# Altium PCB PCB1.PcbDoc
Units mil, origin at the board's own origin, x right, y up, seen from the top; angles counter-clockwise.
Board outline 2900 x 1835 mil, 2 copper layers (Top Layer, Bottom Layer); 33 components, 27 nets, 151 pads, 20 vias.
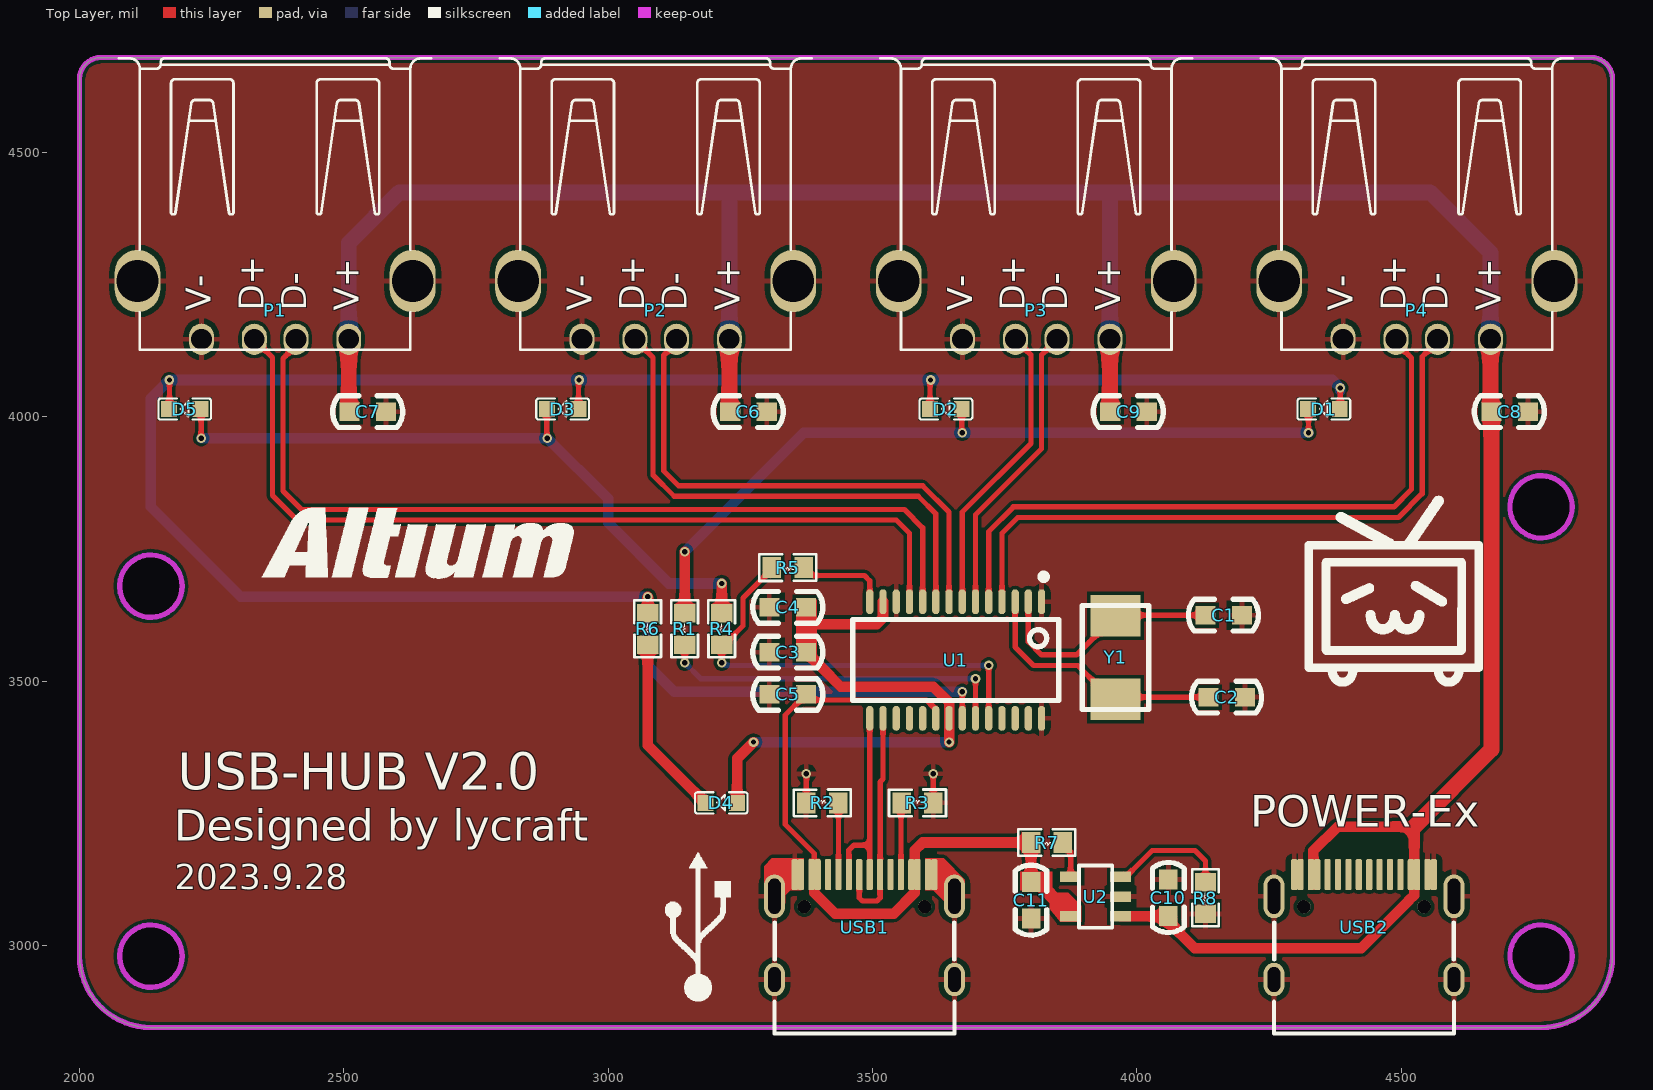
[diagram p0: Top Layer view]
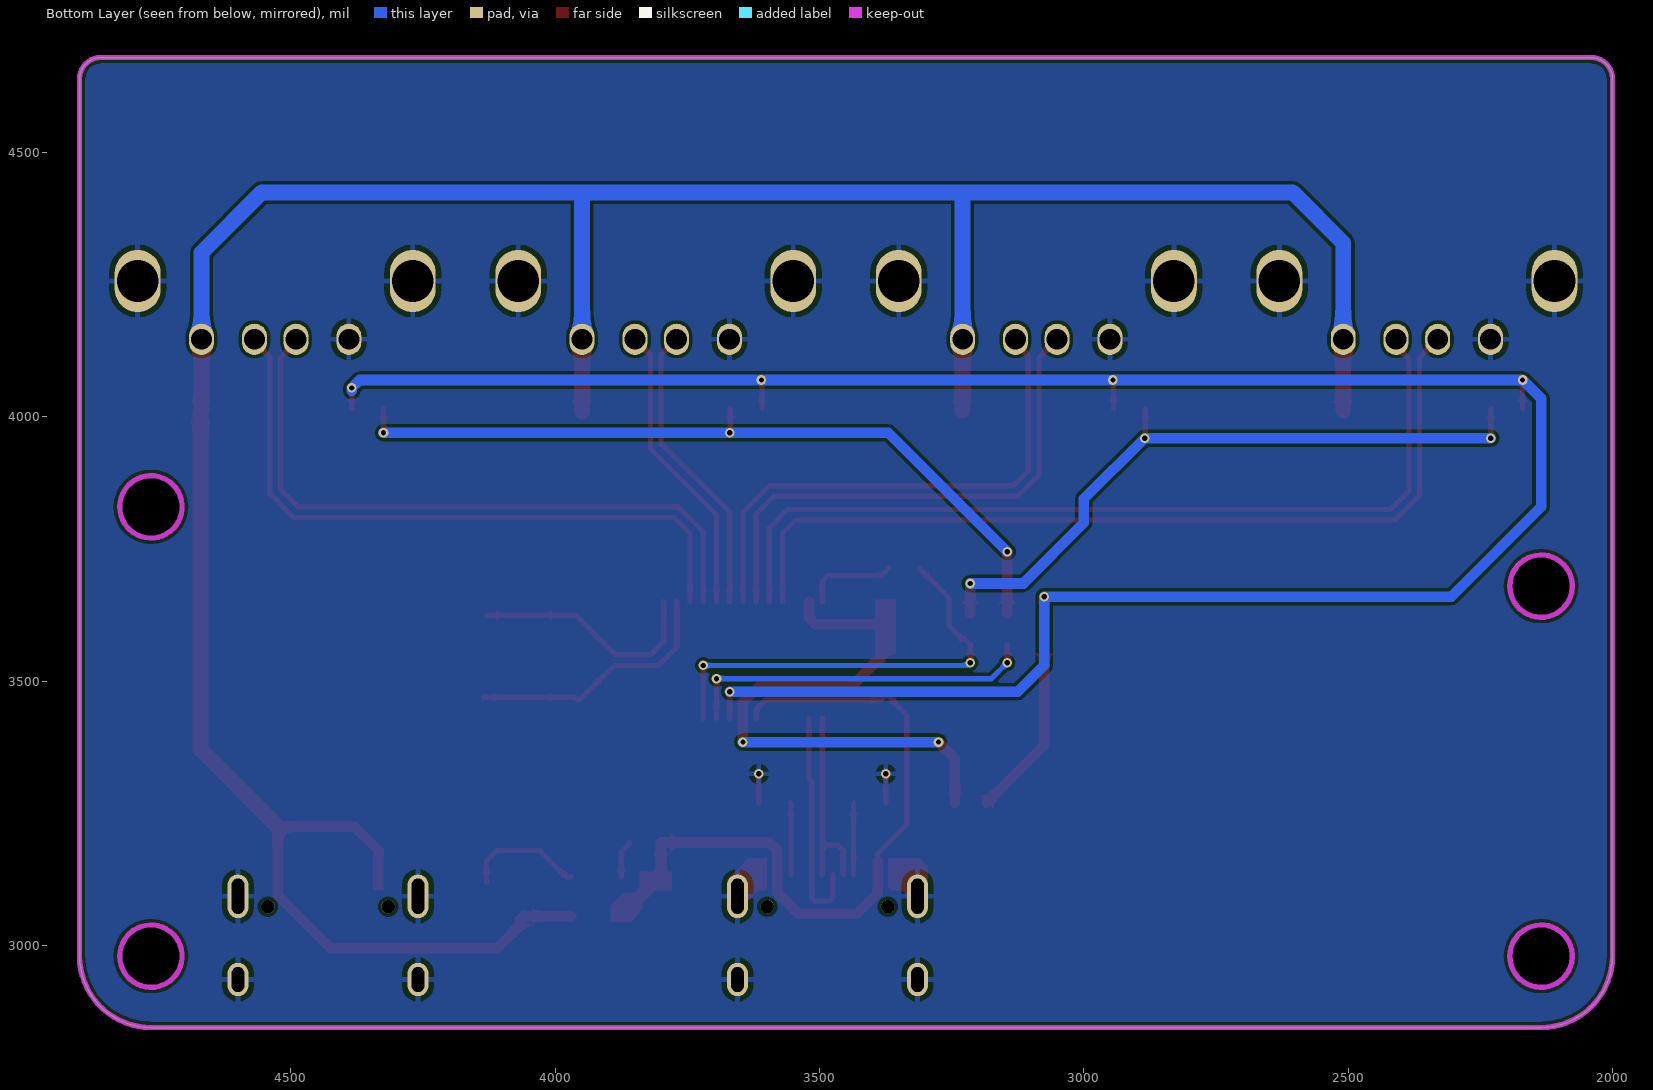
[diagram p1: Bottom Layer view, seen from below]
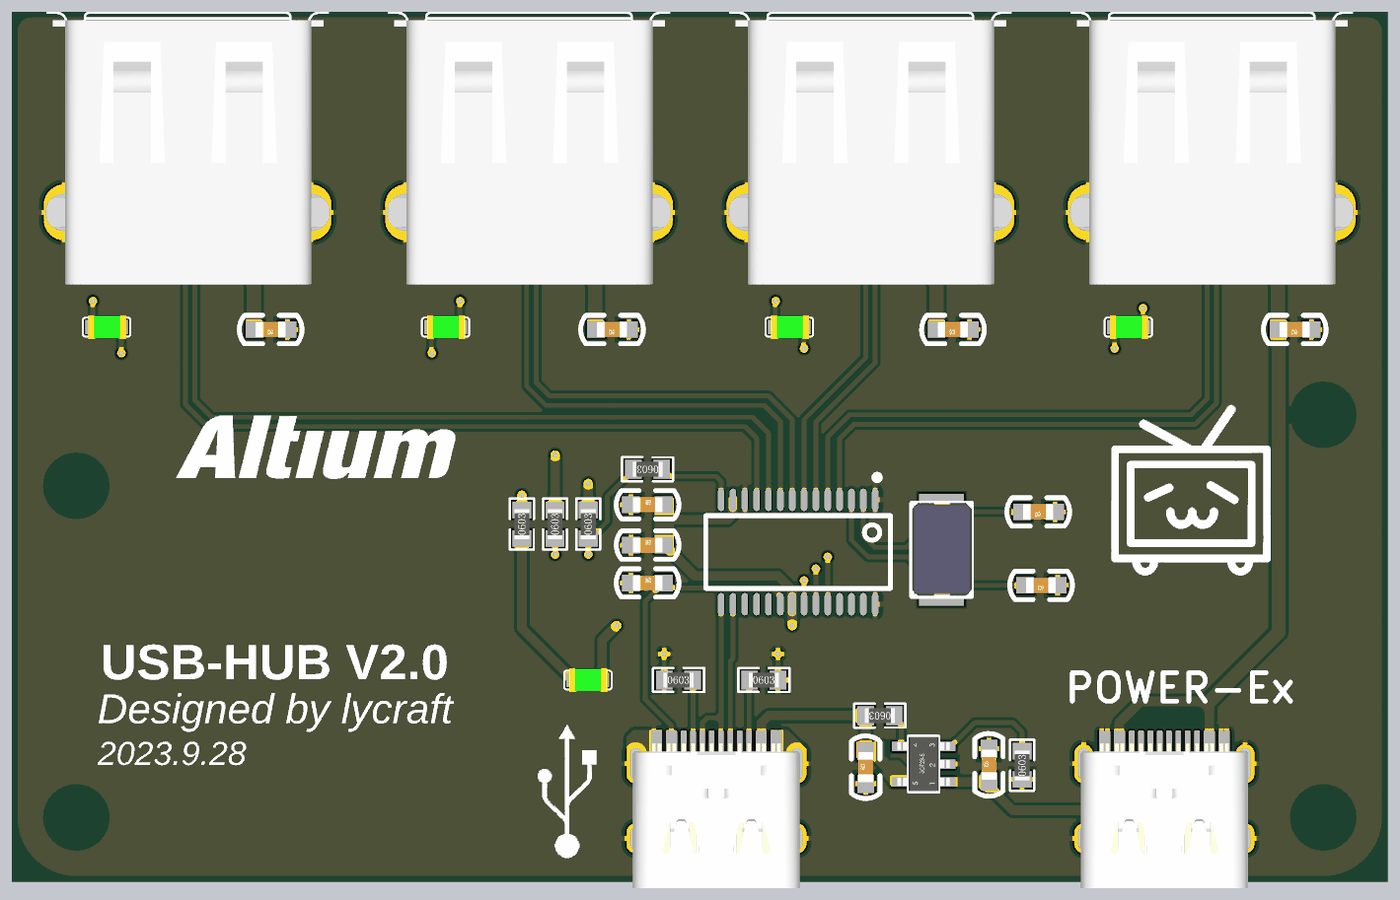
[diagram p2: 3D render of the assembled board from above, using the file's embedded part models]

## Layer stack, top to bottom
Top Solder: solder mask 0.4, Solder Resist, Dk 3.5
Top Layer: signal copper 1.4
Dielectric 1: dielectric 12.6, FR-4, Dk 4.8
Bottom Layer: signal copper 1.4
Bottom Solder: solder mask 0.4, Solder Resist, Dk 3.5

## Board outline
2135,2845 cw(c2135,2980) 2000,2980 2000,4640 cw(c2040,4640) 2040,4680 4860,4680 cw(c4860,4640) 4900,4640 4900,2980 cw(c4765,2980) 4765,2845
cut-out: 2135,3040 cw(c2135,2980.94) 2194.06,2980.94 cw(c2134.97,2980.94) 2134.97,2921.86 cw(c2134.05,2980.92) 2075,2980 cw(c2135,2980)
cut-out: 2135,3740 cw(c2135,3680.94) 2194.06,3680.94 cw(c2134.97,3680.94) 2134.97,3621.86 cw(c2134.05,3680.92) 2075,3680 cw(c2135,3680)
cut-out: 4765,3040 cw(c4765,2980.94) 4824.06,2980.94 cw(c4764.97,2980.94) 4764.97,2921.86 cw(c4764.05,2980.92) 4705,2980 cw(c4765,2980)
cut-out: 4765,3890 cw(c4765,3830.94) 4824.06,3830.94 cw(c4764.97,3830.94) 4764.97,3771.86 cw(c4764.05,3830.92) 4705,3830 cw(c4765,3830)

## Design rules (kind name [scope] priority, off if disabled: settings)
Clearance [All] p1: gap=6 ignorepadtopadclearanceinfootprint=TRUE
PolygonConnect [All] p1: connectstyle=Relief reliefconductorwidth=10 reliefentries=4 polygonreliefangle="90 Angle" airgapwidth=10
RoutingVias [All] p1: holewidth=10 width=18 viastyle="Through Hole" minholewidth=10 minwidth=18 maxholewidth=12 maxwidth=50
SolderMaskExpansion [All] p1: expansion=4 istentingtop=FALSE
Width [All] p1: maxlimit=50 minlimit=6 preferedwidth=10 minimp=50.000000 maximp=50.000000 favimp=50.000000
30 further rules are at their usual default settings.

## Components (designator, comment, footprint, x,y, rotation, side; value= is the part's Value field where it differs from the comment)
C1 "22pF" C0603 4199,3625 r180 top value=104
C2 "22pF" C0603 4205,3470 r180 top value=104
C3 "1uF" C0603 3305,3555 r0 top value=104
C4 "1uF" C0603 3305,3640 r0 top value=104
C5 "1uF" C0603 3305,3475 r0 top value=104
C6 "0.1uF" C0603 3300,4010 r180 top value=104
C7 "0.1uF" C0603 2580,4010 r180 top value=104
C8 "0.1uF" C0603 4740,4010 r180 top value=104
C9 "0.1uF" C0603 4019,4010 r180 top value=104
C10 "10uF" C0603 4060,3056 r90 top value=104
C11 "10uF" C0603 3800,3051 r90 top value=104
D1 "color?" LED0603 4355,4015 r180 top
D2 "color?" LED0603 3640,4015 r180 top
D3 "color?" LED0603 2915,4015 r180 top
D4 "color?" LED0603 3215,3270 r180 top
D5 "color?" LED0603 2200,4015 r180 top
P1 "USB" USBB 2310,4385 r270 top
P2 "USB" USBB 3030,4385 r270 top
P3 "USB" USBB 3750,4385 r270 top
P4 "USB" USBB 4470,4385 r270 top
R1 "220" R0603 3144.87,3599.04 r90 top value=1K
R2 "5.1k" R0603 3405,3270 r0 top value=1K
R3 "5.1k" R0603 3585,3270 r0 top value=1K
R4 "220" R0603 3214.87,3599.04 r90 top value=1K
R5 "1K" R0603 3340,3715 r180 top
R6 "470" R0603 3074.87,3599.04 r90 top value=1K
R7 "1K" R0603 3830,3195 r180 top
R8 "8.45K" R0603 4130,3090 r90 top value=1K
U1 "CH334U" QSOP28 3820,3650.47 r180 top
U2 "MT9700" SOT23-5 3969.49,3055.2 r90 top
USB1 "Type-C" Type-C-TOP 3485,3035 r270 top
USB2 "Type-C" Type-C-TOP 4430,3035 r270 top
Y1 "12M" "5032 2Pin" 3960,3545 r270 top

## Footprints (in the part's own frame and the unit in brackets; to place one, negate y for a bottom-side part, rotate by r counter-clockwise, add the part's x,y. Pads: shape width x height; smd on the part's side, far side on the other; paste and mask are expansions set on the pad)
"5032 2Pin" [mm]
  rect 2x2.4 smd: 1(-2,0) 2(2,0)
  silkscreen extent -2.5,-1.6 2.5,1.6, body extent -2.53,-1.57 2.47,1.63, height 1.3
C0603 [mil]
  rect 38x35 smd: 1(0,0) 2(69,0)
  silkscreen extent -31,-30 101,30, body extent 4,-16 67,16, height 12
LED0603 [mil]
  rect 30x30 smd: 1(-29,0) 2(31,0)
  silkscreen extent -49,-20 51,20, body extent -40,-25 40,25, height 43
QSOP28 [mm]
  oval 0.35x1.2 smd mask+0.051: 1(0,0) 2(0.635,0) 3(1.27,0) 4(1.905,0) 5(2.54,0) 6(3.175,0) 7(3.81,0) 8(4.445,0) 9(5.08,0) 10(5.715,0) 11(6.35,0) 12(6.985,0) 13(7.62,0) 14(8.255,0) 15(8.255,5.6) 16(7.62,5.6) 17(6.985,5.6) 18(6.35,5.6) 19(5.715,5.6) 20(5.08,5.6) 21(4.445,5.6) 22(3.81,5.6) 23(3.175,5.6) 24(2.54,5.6) 25(1.905,5.6) 26(1.27,5.6) 27(0.635,5.6) 28(0,5.6)
  silkscreen extent -0.82,-1.35 9.08,4.75
R0603 [mil]
  rect 35x40 smd: 1(-30,0) 2(30,0)
  silkscreen extent -54,-25 54,25, body extent -32,-16 31,16, height 18
SOT23-5 [mm]
  rect 0.5x1 smd: 1(0,0) 2(0.95,0) 3(1.9,0) 4(1.9,2.4) 5(0,2.4)
  silkscreen extent -0.55,0.4 2.45,2, body extent -0.5,-0.2 2.4,2.6, height 1.09
Type-C-TOP [mm]
  round 0.65 hole 0.65: 0(-0.98,2.89) 0(-0.98,-2.89)
  oval 1.6x1 hole 0.6 slot 1.2 at 0 deg: 1(2.52,4.325) 2(2.52,-4.325)
  oval 2.1x1 hole 0.6 slot 1.7 at 0 deg: 3(-1.48,-4.325) 4(-1.48,4.325)
  rrect50% 1.5x0.3 smd: A1(-2.52,-3.35) A4(-2.52,-2.55) A5(-2.52,-1.25) A6(-2.52,-0.25) A7(-2.52,0.25) A8(-2.52,1.25) A9(-2.52,2.55) A12(-2.52,3.35) B1(-2.52,3.05) B4(-2.52,2.25) B5(-2.52,1.75) B6(-2.52,0.75) B7(-2.52,-0.75) B8(-2.52,-1.75) B9(-2.52,-2.25) B12(-2.52,-3.05)
  silkscreen extent -0.22,-4.33 5.12,4.33, body extent -2.57,-4.48 5.18,4.48, height 3.26
USBB [mm]
  oval 1.5x1.2 hole 1: 1(6.044,5.062) 2(6.044,2.522) 3(6.044,0.522) 4(6.044,-2.018)
  oval 3x2.2 hole 2: 5(3.244,8.132) 6(3.244,-5.088)
  silkscreen extent -7.46,-5.98 6.54,9.02, body extent -7.05,-6.35 7.11,9.45, height 2.4

## Part data
C1 C2 C3 C4 C5 C6 C7 C8 C9 C10 C11: library part 贴片C, "Capacitor", LatestRevisionDate=17-Jul-2002, LatestRevisionNote="Re-released for DXP Platform.", PackageReference=RAD-0.3, Published=8-Jun-2000, Publisher="Altium Limited"
D1 D2 D3 D4 D5: library part 贴片LED, "LED", Type=0402
P1 P2 P3 P4: "USB 1.1, Right Angle, SMT, A Type, Plug, 4 Position, Natural", PackageDocument=21-Jan-2003, ComponentLink1Description="Manufacturer Link", ComponentLink1URL=http://www.tycoelectronics.com/, ComponentLink2Description="Packaging Specification", ComponentLink2URL=http://ecommas.tycoelectronics.com/commerce/DocumentDelivery/DDEController?Action=showdoc&DocId=Customer+Drawing%7F1470695%7FO%7Fpdf%7FEnglish%7FC_1470695_O.pdf, ContactMaterial=Brass, ContactPlating="Gold (30) over Nickel (50)", DatasheetDocument=21-Jan-2003, DrillSize="Corresponds to nominal value.", HousingMaterial=Thermoplastic, PackageReference=1470695A, PanelGround=Without, PCB_Layout="Complies with manufacturer's recommendation.", Published=15-Jul-2004, Publisher="Altium Limited"
R1 R2 R3 R4 R5 R6 R7 R8: library part 贴片R, "Resistor", Published=8-Jun-2000, Publisher="Altium Limited", Revision="July-2002: Re-released for DXP Platform."
U1: "4 ports High-Speed USB MTT Hub with over current detect & power control"
U2: "USB电流保护"
USB1 USB2: library part USB-Type-C-TOP
Y1: library part "XTAL 8Mhz 2pin"

## Via types
v1: diameter 18, hole 10, Top Layer to Bottom Layer, 20 vias

## Nets (pads, with @x,y where several pads share a name; then routed paths per layer and width w, separated by ;. In a path a pad name is that pad's centre, name@x,y a point inside that pad or via, vN(x,y) a via of type N, cw(c..) or ccw(c..) an arc to the next point about the centre after c; other vN are vias at no path point)
3.3V: C3.2 C4.2 D4.1 U1.13 U1.21 | length 1151.2
  Top Layer w20: D4.1 3244,3354 v1(3275,3385) ; C4.2 3374,3615 3374,3602.5 C3.2 3375.5,3555 3402.14,3528.36 3402.14,3527.86 3440,3490 3615,3490 3645,3460 v1(3645,3385) ; 3375,3602.5 3380.75,3608.25 3508.28,3608.25 3520,3619.97 U1.13
  Bottom Layer w20: v1(3275,3385) v1(3645,3385)
DM1: P1.2 U1.10 | length 1675.8
  Top Layer w10: P1.2 2409.28,4135.08 2385,4110.8 2385,3860 2420,3825 3560.36,3825 3595,3790.36 U1.10
DM2: P2.2 U1.8 | length 1000.8
  Top Layer w10: P2.2 3129.28,4141.15 3105,4116.87 3105,3898.28 3133.28,3870 3595,3870 3645,3820 U1.8
DM3: P3.2 U1.6 | length 560.5
  Top Layer w10: U1.6 3695,3815 3820,3940 3820,4117.78 P3.2
DM4: P4.2 U1.4 | length 1259.9
  Top Layer w10: U1.4 3745,3780.15 3774.85,3810 4413.28,3810 4495,3810 4540,3855 4540,4114.09 4569.28,4143.36 P4.2
DMU: U1.15 USB1.A7 USB1.B7 | length 385.6
  Top Layer w10: USB1.B7 3455.47,3180.47 3465,3190 3495,3190 ; USB1.A7 3494.84,3168.74 3495,3168.9 3495,3190 ; U1.15 3495,3190
DP1: P1.3 U1.11 | length 1673.8
  Top Layer w10: P1.3 2365,4112.59 2365,3851.72 2411.72,3805 2460,3805 3545,3805 3570,3780 U1.11
DP2: P2.3 U1.9 | length 1002.9
  Top Layer w10: P2.3 3085,4112.59 3085,3890 3125,3850 3586.72,3850 3620,3816.72 U1.9
DP3: P3.3 U1.7 | length 562.6
  Top Layer w10: U1.7 3670,3820 3800,3950 3800,4117.59 P3.3
DP4: P4.3 U1.5 | length 1262
  Top Layer w10: U1.5 3720,3783.43 3766.57,3830 4486.72,3830 4520,3863.28 4520,4111.68 4490.54,4141.15 P4.3
DPU: U1.16 USB1.A6 USB1.B6 | length 429.9
  Top Layer w10: USB1.A6 3475.16,3090.39 3481.02,3084.53 3508.67,3084.53 3514.53,3090.39 3514.53,3309.53 3520,3315 U1.16
GND: C1.1 C2.1 C3.1 C4.1 C5.1 C6.1 C7.1 C8.1 C9.1 C10.2 C11.1 P1.4 P1.5 P1.6 P2.4 P2.5 P2.6 P3.4 P3.5 P3.6 P4.4 P4.5 P4.6 R2.1 R3.2 R8.1 U1.1 U1.12 U1.28 U2.2 USB1.1 USB1.2 USB1.3 USB1.4 USB1.A1 USB1.A12 USB1.B1 USB1.B12 USB2.1 USB2.2 USB2.3 USB2.4 USB2.A1 USB2.A12 USB2.B1 USB2.B12 | length 168.8
  Top Layer w10: USB1.A1 USB1.B12 ; R2.1 v1(3375,3325) ; USB1.B1 3605.08,3112.18 USB1.B1@3605.98,3111.28 ; R3.2 v1(3615,3325) ; USB1.4@3641.71,3111.28 3655.28,3097.71 USB1.4
LED1: R1.1 U1.23 | length 671.5
  Top Layer w10: R1.1 3145,3568.91 v1(3145,3535) ; U1.23 v1(3695,3505)
  Bottom Layer w10: v1(3145,3535) 3175,3505 v1(3695,3505)
LED2: R4.1 R5.2 U1.24 | length 829
  Top Layer w10: v1(3215,3535) 3214.87,3535.13 R4.1 3227.37,3581.54 3231.54,3581.54 3255,3605 3255,3657.5 3310,3712.5 R5.2 ; U1.24 v1(3720,3530)
  Bottom Layer w10: v1(3215,3535) 3220,3530 v1(3720,3530)
LED3: R5.1 U1.14 | length 176.3
  Top Layer w10: R5.1 3370,3712.5 3382.5,3700 3485,3700 3495,3690 U1.14
LED4: D1.1 D2.2 D3.1 D5.2 R6.2 U1.22 | length 4524.5
  Top Layer w10: D5.2 2170,4016 v1(2170,4070) ; D3.1 2944,4069 v1(2945,4070) ; D2.2 3609,4069 v1(3610,4070) ; U1.22 v1(3670,3480) ; D1.1 4385,4016 v1(4385,4055)
  Top Layer w20: R6.2 3075,3629.17 v1(3075,3660)
  Bottom Layer w20: v1(3670,3480) 3125,3480 3075,3530 v1(3075,3660) 2305,3660 2135,3830 2135,4035 v1(2170,4070) v1(2945,4070) v1(3610,4070) 4370,4070 v1(4385,4055) v1@4385,4050
NetD1_2: D1.2 D2.1 R1.2 | length 1480
  Top Layer w10: D2.1 3669,3971 v1(3670,3970) ; D1.2 4325,4014 v1(4325,3970)
  Top Layer w20: R1.2 3144.87,3744.87 v1(3145,3745)
  Bottom Layer w20: v1(3145,3745) 3370,3970 v1(3670,3970) v1(4325,3970)
NetD3_2: D3.2 D5.1 R4.2 | length 1292.1
  Top Layer w10: D5.1 2230,4014 v1(2230,3960) ; D3.2 2884,3961 v1(2885,3960) ; v1@3214.87,3684.87 v1(3215,3685)
  Top Layer w20: R4.2 v1@3214.87,3684.87
  Bottom Layer w20: v1(2230,3960) v1(2885,3960) 3000,3845 3000,3800 3115,3685 v1(3215,3685)
NetD4_2: D4.2 R6.1 | length 344.2
  Top Layer w20: R6.1 3074.87,3379.13 D4.2
NetR2_2: R2.2 USB1.A5 | length 136.1
  Top Layer w10: R2.2 3435.79,3269.21 USB1.A5
NetR3_1: R3.1 USB1.B5 | length 136.2
  Top Layer w10: USB1.B5 3553.9,3268.9 R3.1
NetR7_1: R7.1 U2.4 | length 71.2
  Top Layer w10: R7.1 3860,3192.5 3875,3177.5 U2.4
NetR8_2: R8.2 U2.3 | length 229.5
  Top Layer w10: U2.3 3979.33,3130 4029.33,3180 4110,3180 4130,3160 R8.2
Vbus: C6.2 C7.2 C8.2 C9.2 C10.1 P1.1 P2.1 P3.1 P4.1 U2.1 USB2.A4 USB2.A9 USB2.B4 USB2.B9 | length 5470.2
  Top Layer w10: C7.2@2509.27,4011.73 C7.2 ; C6.2@3229.27,4011.73 C6.2 ; C9.2@3949.27,4010.73 C9.2
  Top Layer w20: U2.1 4059.2,3055.2 C10.1 4067.5,3048.5 4067.5,3037.5 4110,2995 4425,2995 4514.98,3084.98 4514.98,3085.51 4525,3095.53 4525,3105 ; 4335,3165 4334.32,3165.68 4334.32,3179.32 4380,3225 4525,3225 4525,3165 ; C8.2@4669.27,4011.73 C8.2
  Top Layer w30: C7.2@2509.27,4011.73 P1.1 ; C6.2@3229.27,4011.73 P2.1 ; C9.2@3949.27,4010.73 P3.1 ; 4525,3225 4671,3371 C8.2 ; C8.2@4669.27,4011.73 P4.1
  Bottom Layer w30: P1.1 2509.27,4329.27 2605,4425 3230,4425 ; P2.1 3229.27,4424.27 3230,4425 ; P3.1 3949.27,4420.73 3945,4425 ; P4.1 4669.27,4310.73 4555,4425 3945,4425 ; 3230,4425 3945,4425
VCC: C5.2 C11.2 R7.2 U1.20 U2.5 USB1.A4 USB1.A9 USB1.B4 USB1.B9 | length 1204
  Top Layer w10: 3390,3165 3390,3174.14 3335,3229.14 3335,3436 3360,3461 3360,3462.5 3372.5,3475 C5.2 3384.38,3464.62 3602.41,3464.62 3620,3447.03 U1.20 ; USB1.B4 USB1.A9@3580,3127.8 ; USB1.B4@3574.84,3109.84 3579.67,3109.84 USB1.A9@3584.49,3109.84 ; USB1.A9@3584.49,3127.8 3584.49,3133.31 USB1.A9
  Top Layer w20: 3390,3105 3390,3100 3430,3060 3540,3060 3579.67,3099.67 USB1.A9@3579.67,3109.84 ; 3580,3165 3580,3180 3595,3195 R7.2 C11.2
XTALI: C2.2 U1.3 Y1.2 | length 493.9
  Top Layer w10: U1.3 3770,3565 3805,3530 3888.39,3530 3952.13,3466.26 Y1.2 3963.74,3470 C2.2
XTALO: C1.2 U1.2 Y1.1 | length 451.9
  Top Layer w10: U1.2 3795,3575 3820,3550 3886.26,3550 Y1.1 3961.26,3625 C1.2
pads on no net: U1.17 U1.18 U1.19 U1.25 U1.26 U1.27 USB1.0 USB1.A8 USB1.B8 USB2.0 USB2.A5 USB2.A6 USB2.A7 USB2.A8 USB2.B5 USB2.B6 USB2.B7 USB2.B8

## Polygon pours and split planes (outlines as drawn)
GND on Top Layer "GND_L01_P001" (solid, remove dead copper, pour order 1): 2000,2980 2000,4640 cw(c2040,4640) 2040,4680 4860,4680 cw(c4860,4640) 4900,4640 4900,2980 cw(c4765,2980) 4765,2845 2135,2845 cw(c2135,2980)
GND on Bottom Layer "GND_L02_P000" (solid, remove dead copper, pour order 0): 2000,2980 2000,4640 cw(c2040,4640) 2040,4680 4860,4680 cw(c4860,4640) 4900,4640 4900,2980 cw(c4765,2980) 4765,2845 2135,2845 cw(c2135,2980)

## Keep-outs
Keep-Out Layer:
  circle w10: c2135,3680 r59.06
  circle w10: c2135,2980 r59.06
  circle w10: c4765,2980 r59.06
  circle w10: c4765,3830 r59.06
  lines w10: 2000,2980 ccw(c2135,2980) 2135,2845 4765,2845 ccw(c4765,2980) 4900,2980 4900,4640 ccw(c4860,4640) 4860,4680 2040,4680 ccw(c2040,4640) 2000,4640 2000,2980

## Other copper
Top Layer:
  rectangle net 3.3V: 3355,3550 3395,3655
  rectangle net Vbus: 4325,3105 4345,3165
  rectangle net Vbus: 4515,3105 4535,3165
  rectangle net VCC: 3570,3105 3590,3165
  rectangle net VCC: 3380,3105 3400,3165
  region net GND: 3370,3165 3370,3110 3365,3105 3345,3105 3335,3095 3335,3080 3295,3080 3295,3150 3310,3165
  region net GND: 3600,3165 3600,3105 3615,3105 3635,3085 3675,3085 3675,3125 3635,3165
  region net VCC: 3855,3045 3895,3045 3895,3075 3870,3100 3850,3100 3840,3110 3840,3140 3780,3140 3780,3105 3810,3105 3835,3080 3835,3070

## Silkscreen, mask and mechanical layers (free items; w line width, h text height)
Top Overlay:
  drawing of 12 lines, arcs and shapes, not listed
  text "USB-HUB V2.0" at 2186.09,3271.44 h120
  text "POWER-Ex" at 4215,3225 h60
  text "Designed by lycraft" at 2179.5,3178.87 h100
  text "2023.9.28" at 2180,3090.89 h80

## Text inside footprints (layer, text, board x,y; h text height)
P1: Top Overlay "D-" at 2428.54,4200.78 h47.24 r90; Top Overlay "D+" at 2348.54,4200.78 h47.24 r90; Top Overlay "V-" at 2248.54,4200.78 h47.24 r90; Top Overlay "V+" at 2528.54,4200.78 h47.24 r90
P2: Top Overlay "D-" at 3148.54,4200.78 h47.24 r90; Top Overlay "D+" at 3068.54,4200.78 h47.24 r90; Top Overlay "V-" at 2968.54,4200.78 h47.24 r90; Top Overlay "V+" at 3248.54,4200.78 h47.24 r90
P3: Top Overlay "V+" at 3968.54,4200.78 h47.24 r90; Top Overlay "V-" at 3688.54,4200.78 h47.24 r90; Top Overlay "D+" at 3788.54,4200.78 h47.24 r90; Top Overlay "D-" at 3868.54,4200.78 h47.24 r90
P4: Top Overlay "V+" at 4688.54,4200.78 h47.24 r90; Top Overlay "V-" at 4408.54,4200.78 h47.24 r90; Top Overlay "D+" at 4508.54,4200.78 h47.24 r90; Top Overlay "D-" at 4588.54,4200.78 h47.24 r90